# EAGLE board Arduino Ibus (EAGLE 6.5.0)
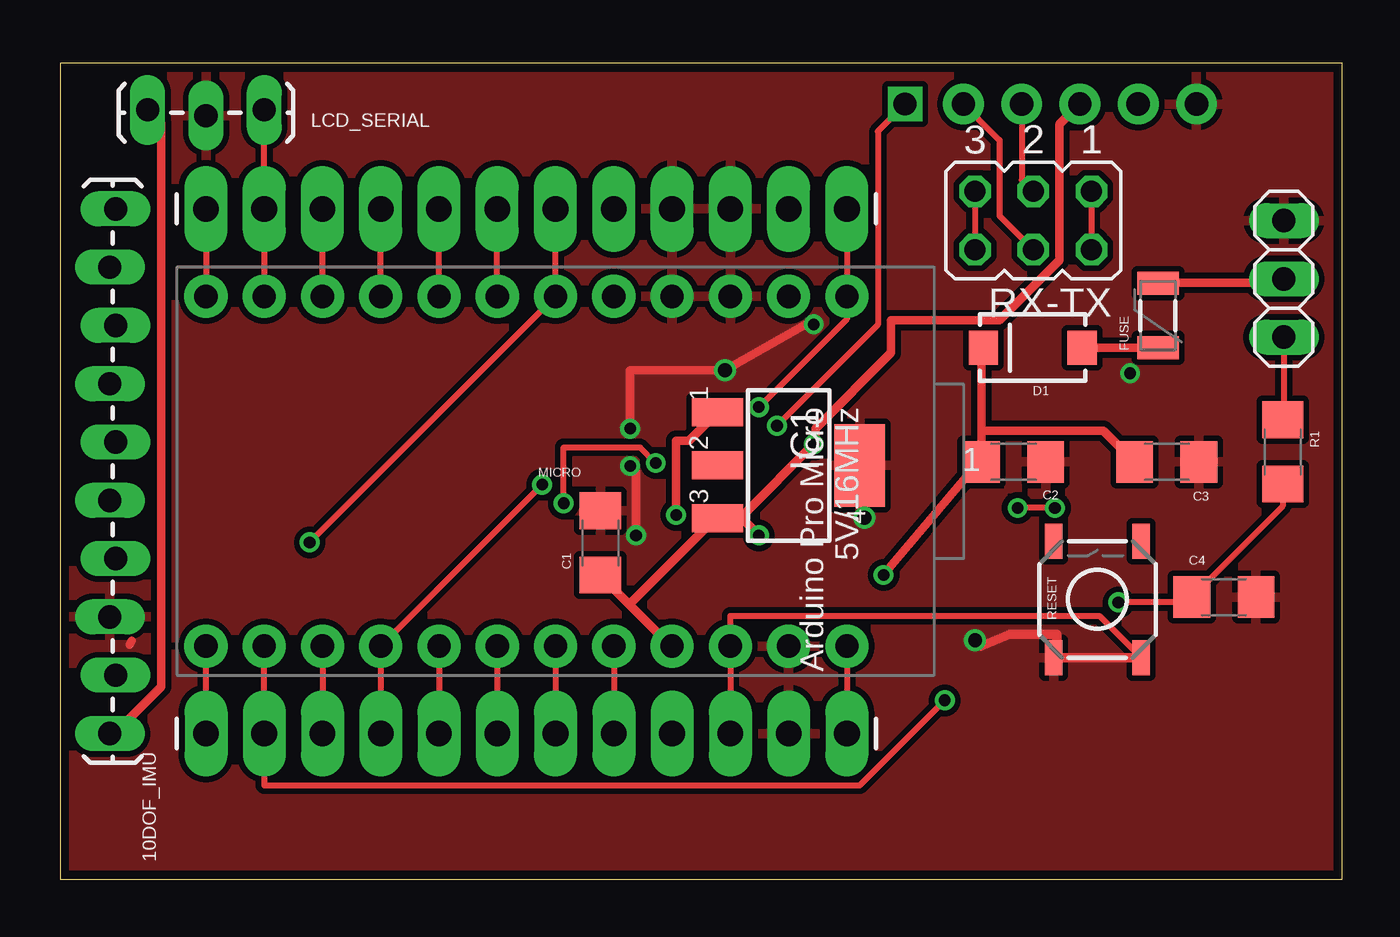
[diagram p0: board, top side]
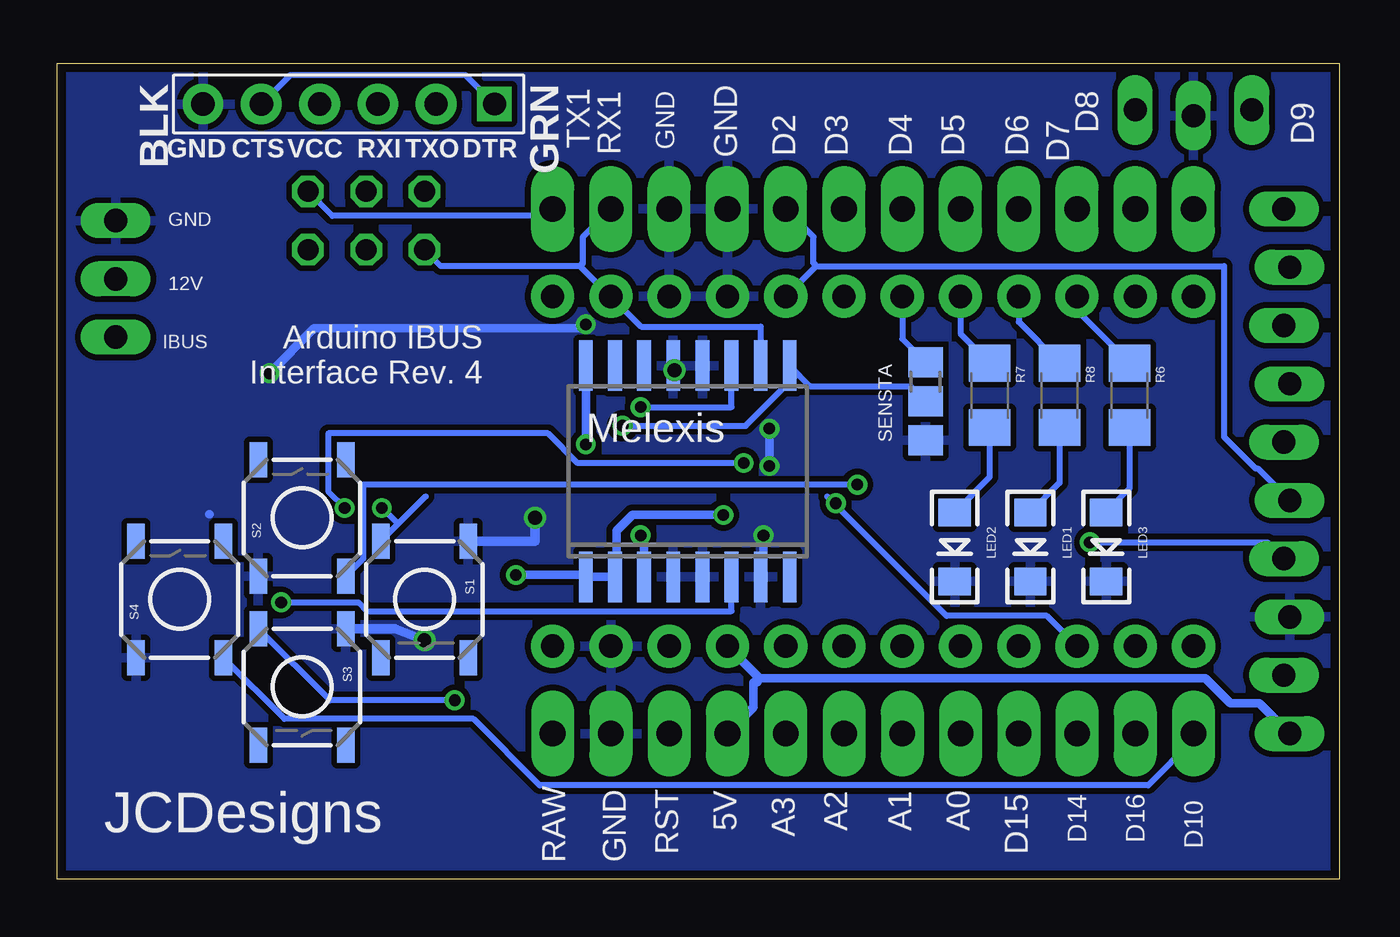
[diagram p1: board, bottom side, seen from below]

Size 55.88 x 35.56 mm. Coordinates in mm from the lower left corner, seen from the top.
Outline: 0,0 55.88,0 55.88,35.56 0,35.56 0,0
Copper layers (1*16): Top 0.0356mm / dielectric 1.5011mm / Bottom 0.0356mm
Design rules "LaenPCBOrder": minimum track width 6mil, minimum drill 13mil, track to track 6mil, track to pad 6mil, pad to pad 6mil, via to via 6mil, smd to smd 6mil, copper to edge 15mil, drill to drill 6mil, minimum pad ring 7mil, minimum via ring 7mil, stop-mask expansion 4mil, vias tented up to drill 0mil, thermal gap 10mil
Net classes: 0 default: width 0.254 mm, drill 0.508 mm, clearance 0.254 mm; 1 GND: width 0.254 mm, drill 0.508 mm, clearance 0.254 mm; 2 POWER: width 0.381 mm, drill 0.508 mm, clearance 0.254 mm

## Footprints (pad centres in the part's own frame; a part is rotated, then mirrored left to right if it is on the bottom)
1X10_LOCK_LONGPADS = drill 1.016 long: 1 0,0.127; 2 2.54,-0.127; 3 5.08,0.127; 4 7.62,-0.127; 5 10.16,0.127; 6 12.7,-0.127; 7 15.24,0.127; 8 17.78,-0.127; 9 20.32,0.127; 10 22.86,-0.127
C1206 = smd 1.6 x 1.8: 1 -1.4,0; 2 1.4,0
SMA-DIODE = smd 1.27 x 1.47: A -2.15,0; C 2.15,0
PTC-1206 = smd 1 x 1.8: 1 -1.4,0; 2 1.4,0
SOT223 = smd 1.219 x 2.235: 1 -2.311,-3.099; 2 0,-3.099; 3 2.311,-3.099 | smd 3.6 x 2.2: 4 0,3.099
1X12_LONGPADS = drill 1.118 pad 1.88 long: 1 0,0; 2 2.54,0; 3 5.08,0; 4 7.62,0; 5 10.16,0; 6 12.7,0; 7 15.24,0; 8 17.78,0; 9 20.32,0; 10 22.86,0; 11 25.4,0; 12 27.94,0
FTDI_DEVICE_SIDE = drill 1 square: P$1 -6.35,0 | drill 1.016 pad 1.778: P$2 -3.81,0; P$3 -1.27,0; P$4 1.27,0; P$5 3.81,0; P$6 6.35,0
1X03 = drill 1.016 long: 1 -2.54,0; 2 0,0; 3 2.54,0
1X03_LOCK_LONGPADS = drill 1.016 long: 1 0,0; 2 2.54,-0.254; 3 5.08,0
LED-1206 = smd 1.2 x 1.4: A -1.5,0; C 1.5,0
ARDUINO_PRO_MICRO = drill 1.016 pad 1.88: 1 -7.62,12.7; 2 -7.62,10.16; 3 -7.62,7.62; 4 -7.62,5.08; 5 -7.62,2.54; 6 -7.62,0; 7 -7.62,-2.54; 8 -7.62,-5.08; 9 -7.62,-7.62; 10 -7.62,-10.16; 11 -7.62,-12.7; 12 -7.62,-15.24; 13 7.62,-15.24; 14 7.62,-12.7; 15 7.62,-10.16; 16 7.62,-7.62; 17 7.62,-5.08; 18 7.62,-2.54; 19 7.62,0; 20 7.62,2.54; 21 7.62,5.08; 22 7.62,7.62; 23 7.62,10.16; 24 7.62,12.7
1206 = smd 1.6 x 1.8: 1 -1.4,0; 2 1.4,0
TACTILE_SWITCH_SMD = smd 1.524 x 0.762: 1 -2.54,1.905; 2 2.54,1.905; 3 -2.54,-1.905; 4 2.54,-1.905
JP3Q = drill 0.914 octagon: 1 -2.54,-1.27; 2 -2.54,1.27; 3 0,-1.27; 4 0,1.27; 5 2.54,-1.27; 6 2.54,1.27
B0R-JMP = smd 1.5 x 1.3: 1 0,1.7; 2 0,0; 3 0,-1.7
SO16W = smd 0.6 x 2.2: 1 -4.445,-4.6; 2 -3.175,-4.6; 3 -1.905,-4.6; 4 -0.635,-4.6; 5 0.635,-4.6; 6 1.905,-4.6; 7 3.175,-4.6; 8 4.445,-4.6; 9 4.445,4.6; 10 3.175,4.6; 11 1.905,4.6; 12 0.635,4.6; 13 -0.635,4.6; 14 -1.905,4.6; 15 -3.175,4.6; 16 -4.445,4.6

## Placement (x,y rotation side)
10DOF_IMU  M10LOCK_LONGPADS  [1X10_LOCK_LONGPADS]  2.29,6.35 90 top
C1  6.8uF  [C1206]  23.55,14.66 90 top
C2  47uF  [C1206]  41.55,18.19 0 top
C3  .047uF  [C1206]  48.23,18.19 0 top
C4  100pF  [C1206]  50.72,12.29 0 top
D1  1N4148  [SMA-DIODE]  42.39,23.16 180 top
FUSE  PTCSMD  [PTC-1206]  47.85,24.56 90 top
IC1  LM340MP-05  [SOT223]  31.75,18.03 270 top
JP1  M12LONGPADS  [1X12_LONGPADS]  6.35,29.21 0 top
JP2  M12LONGPADS  [1X12_LONGPADS]  34.29,6.35 180 top
JP3  FTDI_DEVICE  [FTDI_DEVICE_SIDE]  43.18,33.78 180 bottom
JP6  [1X03]  53.34,26.16 270 top
LCD_SERIAL  [1X03_LOCK_LONGPADS]  3.81,33.53 0 top
LED1  [LED-1206]  13.46,14.48 270 bottom
LED2  [LED-1206]  16.76,14.48 270 bottom
LED3  [LED-1206]  10.16,14.48 270 bottom
MICRO  ARDUINO_PRO_MICRO  [ARDUINO_PRO_MICRO]  21.59,17.78 270 top
R1  10  [1206]  53.29,18.62 270 top
R6  220  [1206]  9.14,21.08 270 bottom
R7  220  [1206]  15.24,21.08 270 bottom
R8  220  [1206]  12.19,21.08 270 bottom
RESET  SWITCH-MOMENTARY-2SMD  [TACTILE_SWITCH_SMD]  45.21,12.19 90 top
RX-TX  [JP3Q]  42.42,28.7 180 top
S1  SWITCH-MOMENTARY-2SMD  [TACTILE_SWITCH_SMD]  39.88,12.19 270 bottom
S2  SWITCH-MOMENTARY-2SMD  [TACTILE_SWITCH_SMD]  45.21,15.75 90 bottom
S3  SWITCH-MOMENTARY-2SMD  [TACTILE_SWITCH_SMD]  45.21,8.38 270 bottom
S4  SWITCH-MOMENTARY-2SMD  [TACTILE_SWITCH_SMD]  50.55,12.19 90 bottom
SENSTA  0R-JUMPB  [B0R-JMP]  18.03,20.83 180 bottom
U$1  TH3122  [SO16W]  28.4,17.78 0 bottom

## Library data of the parts
10DOF_IMU JP1-JP3 LCD_SERIAL = SparkFun-Connectors
C1-C4 = resistor
D1 = SparkFun-DiscreteSemi
FUSE = SparkFun-PowerIC; PROD_ID: RES-11150
IC1 = linear
JP6 = pinhead
LED1-LED3 = SparkFun-LED
MICRO = SparkFun-Boards
R1 R6-R8 = SparkFun-Passives
RESET S1-S4 = SparkFun-Electromechanical
RX-TX = jumper
SENSTA = jump-0r-smd
U$1 = Melexisth3122

## Nets
12V [POWER]: FUSE.2 JP6.2
12V_TAP [POWER]: C2.1 C3.1 D1.C IC1.1 U$1.1 U$1.2
+3.3V: 10DOF_IMU.2
+5V [POWER]: 10DOF_IMU.1 C1.1 IC1.3 JP2.4 JP3.P$4 LCD_SERIAL.1 MICRO.21 U$1.3 U$1.16
+12V [POWER]: D1.A FUSE.1
A0: JP2.8 MICRO.17
A1: JP2.7 MICRO.18
A2: JP2.6 MICRO.19
A3: JP2.5 MICRO.20
A_INT1: 10DOF_IMU.7
D4: JP1.6 MICRO.7 SENSTA.3
D5: JP1.5 MICRO.8 R7.1
D6: JP1.4 MICRO.9 R8.1
D7: JP1.3 MICRO.10 R6.1
D8: JP1.2 LCD_SERIAL.3 MICRO.11
D9: JP1.1 MICRO.12
D10: JP2.12 MICRO.13 S4.3
D14: JP2.10 MICRO.15 S1.3
D15: JP2.9 MICRO.16 S2.3
D16: JP2.11 MICRO.14 S3.3
FTDI_RX: JP3.P$3 RX-TX.3
FTDI_TX: JP3.P$2 RX-TX.4
GND [GND]: 10DOF_IMU.3 C1.2 C2.2 C3.2 C4.2 IC1.4 JP1.9 JP1.10 JP2.2 JP3.P$6 JP6.1 LCD_SERIAL.2 LED1.C LED2.C LED3.C MICRO.3 MICRO.4 MICRO.23 RESET.1 S1.1 S2.1 S3.1 S4.1 SENSTA.1 U$1.4 U$1.5 U$1.7 U$1.12 U$1.13
IBUS: JP6.3 R1.1
M_DRDY: 10DOF_IMU.6
N$1: LED1.A R8.2
N$2: LED2.A R7.2
N$4: C4.1 R1.2 U$1.6
N$5: LED3.A R6.2
P_EOC: 10DOF_IMU.10
P_XCLR: 10DOF_IMU.9
RAW: JP2.1 MICRO.24
RESET: JP2.3 MICRO.22 RESET.3
RXD: JP1.11 MICRO.2 RX-TX.5 RX-TX.6 U$1.10
SCL: 10DOF_IMU.4 JP1.7 MICRO.6
SDA: 10DOF_IMU.5 JP1.8 MICRO.5
SENSTA: JP3.P$1 JP3.P$5 SENSTA.2 U$1.9
T_INT1: 10DOF_IMU.8
TXD: JP1.12 MICRO.1 RX-TX.1 RX-TX.2 U$1.11

## Tracks (layer width: path | path; a pad name or v marks a point on that pad's centre or on a via)
12V
  Top 0.381: JP6.2 53.34,25.98 47.85,25.98 FUSE.2
12V_TAP  (via drill 0.51)
  Top 0.381: IC1.1 27.41,19.1 26.85,19.1 v26.85,15.88 | 40.16,19.53 C2.1 39.98,18.11 v35.89,13.26 | 40.16,19.53 40.16,23.09 D1.C | 40.16,19.53 45.47,19.53 46.81,18.19 C3.1
  Bottom 0.381: v26.85,15.88 30.81,15.88 31.5,15.19 31.5,13.36 U$1.2 32.66,13.18 U$1.1 33.02,13.26 v35.89,13.26
+5V  (via drill 0.51)
  Top 0.381: 29.72,15.72 v30.45,14.99 | 29.72,15.72 IC1.3 28.47,15.65 24.94,12.12 24.94,12.09 24.82,11.96 | 29.72,15.72 29.79,15.9 v32.84,18.95 32.92,19.13 32.92,19.63 36.22,22.94 36.22,24.36 40.95,24.36 43.56,26.98 43.56,32.89 JP3.P$4 | 24.82,11.96 26.62,10.16 MICRO.21 | 24.82,11.96 23.55,13.23 C1.1 | LCD_SERIAL.1 4.39,32.94 4.39,8.38 2.36,6.35 10DOF_IMU.1
  Bottom 0.381: U$1.3 30.3,14.99 v30.45,14.99 | v32.84,18.95 U$1.16 | 10DOF_IMU.1 3.48,7.67 4.75,7.67 5.84,8.76 25.27,8.76 | MICRO.21 25.27,8.76 | JP2.4 25.53,7.49 25.53,8.59 25.35,8.59 25.27,8.76
+12V
  Top 0.381: D1.A FUSE.1
A0
  Top 0.254: MICRO.17 JP2.8
A1
  Top 0.254: MICRO.18 JP2.7
A2
  Top 0.254: MICRO.19 JP2.6
A3
  Top 0.254: MICRO.20 JP2.5
D4
  Top 0.254: MICRO.7 JP1.6
  Bottom 0.254: MICRO.7 19.05,23.55 SENSTA.3
D5
  Top 0.254: MICRO.8 JP1.5
  Bottom 0.254: MICRO.8 16.51,23.77 15.24,22.5 R7.1
D6
  Top 0.254: MICRO.9 JP1.4
  Bottom 0.254: MICRO.9 13.97,24.28 12.19,22.5 R8.1
D7
  Top 0.254: MICRO.10 JP1.3
  Bottom 0.254: MICRO.10 11.43,24.79 9.14,22.5 R6.1
D8
  Top 0.254: LCD_SERIAL.3 JP1.2 MICRO.11
D9
  Top 0.254: JP1.1 MICRO.12
D10
  Top 0.254: JP2.12 MICRO.13
  Bottom 0.254: S4.3 45.97,6.99 37.74,6.99 34.85,4.09 8.33,4.09 6.35,6.07 JP2.12
D14  (via drill 0.51)
  Top 0.254: MICRO.15 JP2.10 | v43.36,16.18 v41.73,16.18 | v25.96,18.14 25.27,18.82 21.95,18.82 v21.95,16.38
  Bottom 0.254: 39.83,16.69 41.03,15.48 | 41.03,15.48 S1.3 | 21.98,16.34 17.12,11.48 12.75,11.48 MICRO.15 | 21.98,16.34 22.33,16.69 | v41.73,16.18 41.03,15.48 | v43.36,16.18 44.07,16.89 44.07,19.43 34.49,19.43 33.2,18.14 v25.96,18.14 | v21.95,16.38 21.98,16.34
D15  (via drill 0.51)
  Top 0.254: v21.01,17.2 MICRO.16 JP2.9
  Bottom 0.254: S2.3 42.55,13.97 42.55,17.2 v21.01,17.2
D16  (via drill 0.51)
  Top 0.254: v38.56,7.8 34.85,4.09 8.89,4.09 JP2.11 MICRO.14
  Bottom 0.254: S3.3 43.99,7.8 v38.56,7.8
FTDI_RX
  Top 0.254: RX-TX.3 41.91,30.48 JP3.P$3
FTDI_TX
  Top 0.254: RX-TX.4 40.95,28.91 40.95,32.21 JP3.P$2
GND  (via drill 0.51, 0.6, 0.6 pad 0.3)
  Top 0.381: 42.47,18.16 C2.2 | v32.84,24.18 32.51,24.18 v28.98,22.17 24.84,22.17 v24.84,19.63 | v24.84,18.01 25.09,17.75 v25.09,14.99 | 3.12,10.39 3.02,10.21
  Top 0.406: v35.05,15.75 34.85,17.02 IC1.4 | 43.43,9.65 47.24,9.65 | 43.43,9.65 43.43,10.67 41.4,10.67 40.13,10.16 v39.88,10.41 | 43.43,9.65 RESET.1
  Bottom 0.381: v46.63,22.05 44.68,24 33.02,24 v32.84,24.18 | v24.84,18.01 v24.84,19.63 | v25.09,14.99 25.09,13.18 U$1.7 | 49.25,15.9 49.26,15.91
  Bottom 0.406: S1.1 35.05,14.73 v35.05,15.75 | v28.98,22.17 28.98,22.33 U$1.13 | v39.88,10.41 41.15,10.92 S3.1
  pour Bottom: 0,0 0,35.56 55.88,35.56 55.88,0
  pour Top: 0,0 0,35.56 55.88,35.56 55.88,0
IBUS
  Top 0.254: JP6.3 53.34,20.09 53.29,20.04 R1.1
N$1
  Bottom 0.254: R8.2 12.19,17.27 13.46,16 LED1.A
N$2
  Bottom 0.254: R7.2 15.24,17.53 16.76,16 LED2.A
N$4  (via drill 0.51)
  Top 0.254: R1.2 53.29,16.26 C4.1 49.2,12.24 49.2,12.06 v46.13,12.06
  Bottom 0.254: U$1.6 26.49,11.68 42.37,11.68 42.75,12.06 v46.13,12.06
N$5
  Bottom 0.254: R6.2 9.14,17.02 10.16,16 LED3.A
RAW
  Top 0.254: MICRO.24 JP2.1
RESET
  Top 0.254: RESET.3 45.29,11.48 29.21,11.48 MICRO.22 JP2.3
RXD
  Top 0.254: RX-TX.5 RX-TX.6
  Bottom 0.254: U$1.10 25.22,24.08 30.43,24.08 MICRO.2 31.85,25.48 33.1,26.72 | RX-TX.6 39.17,26.72 33.1,26.72 | JP1.11 32.97,27.99 32.97,26.82 33.02,26.82 33.1,26.72
SCL  (via drill 0.51)
  Top 0.254: v10.87,14.68 MICRO.6 JP1.7
  Bottom 0.254: 10DOF_IMU.4 3.12,14.68 v10.87,14.68
SDA
  Bottom 0.254: 10DOF_IMU.5 3.56,17.91 3.66,17.91 5.03,19.28 5.03,26.72 22.81,26.72 | MICRO.5 22.81,26.72 | JP1.8 22.91,27.99 22.91,26.82 22.89,26.82 22.81,26.72
SENSTA  (via drill 0.51)
  Top 0.254: v31.24,19.76 35.64,24.16 35.64,32.59 JP3.P$1
  Bottom 0.254: SENSTA.2 18.69,21.49 23.06,21.49 U$1.9 23.7,21.95 25.88,19.76 v31.24,19.76 | JP3.P$1 38.1,35.05 45.72,35.05 JP3.P$5
TXD  (via drill 0.51)
  Top 0.254: v30.45,20.57 34.29,24.41 MICRO.1 JP1.12 | RX-TX.1 RX-TX.2
  Bottom 0.254: U$1.11 26.49,20.57 v30.45,20.57 | RX-TX.1 43.89,28.91 34.59,28.91 JP1.12

## Text on the board
tNames: Arduino Pro Micro / 5V/16MHz | 1
bNames: GND | D9 | D8 | GND | RX1 | TX1 | D7 | D6 | D5 | D4 | D3 | D2 | GND | 12V | Arduino IBUS / Interface Rev. 4 | IBUS | GND | RAW | D16 | D14 | A0 | A1 | A2 | A3 | 5V | JCDesigns | D10 | D15 | RST